# EAGLE board panel - type I - front - complete (EAGLE 6.1)
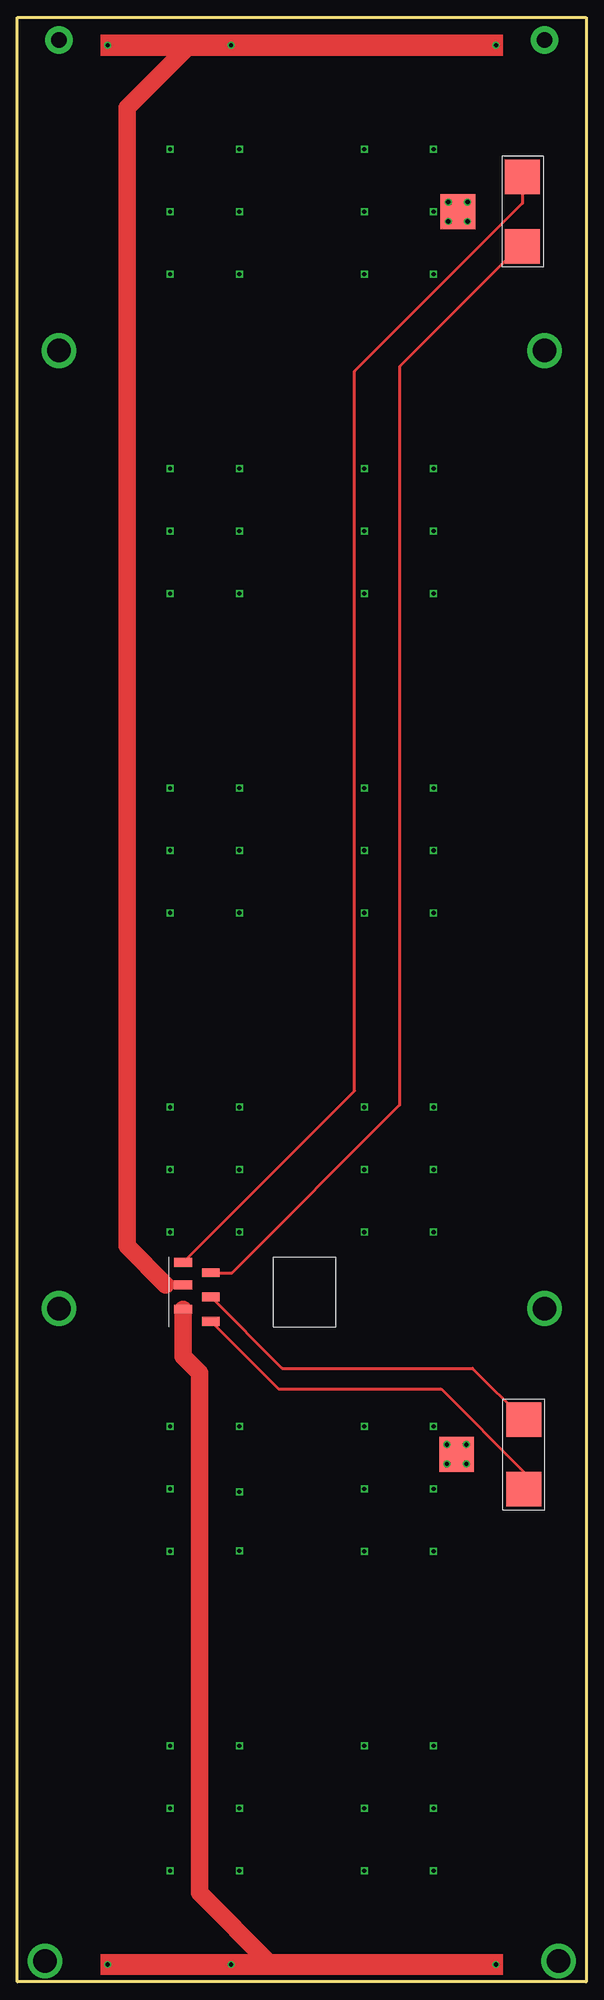
[diagram p0: board, top side]
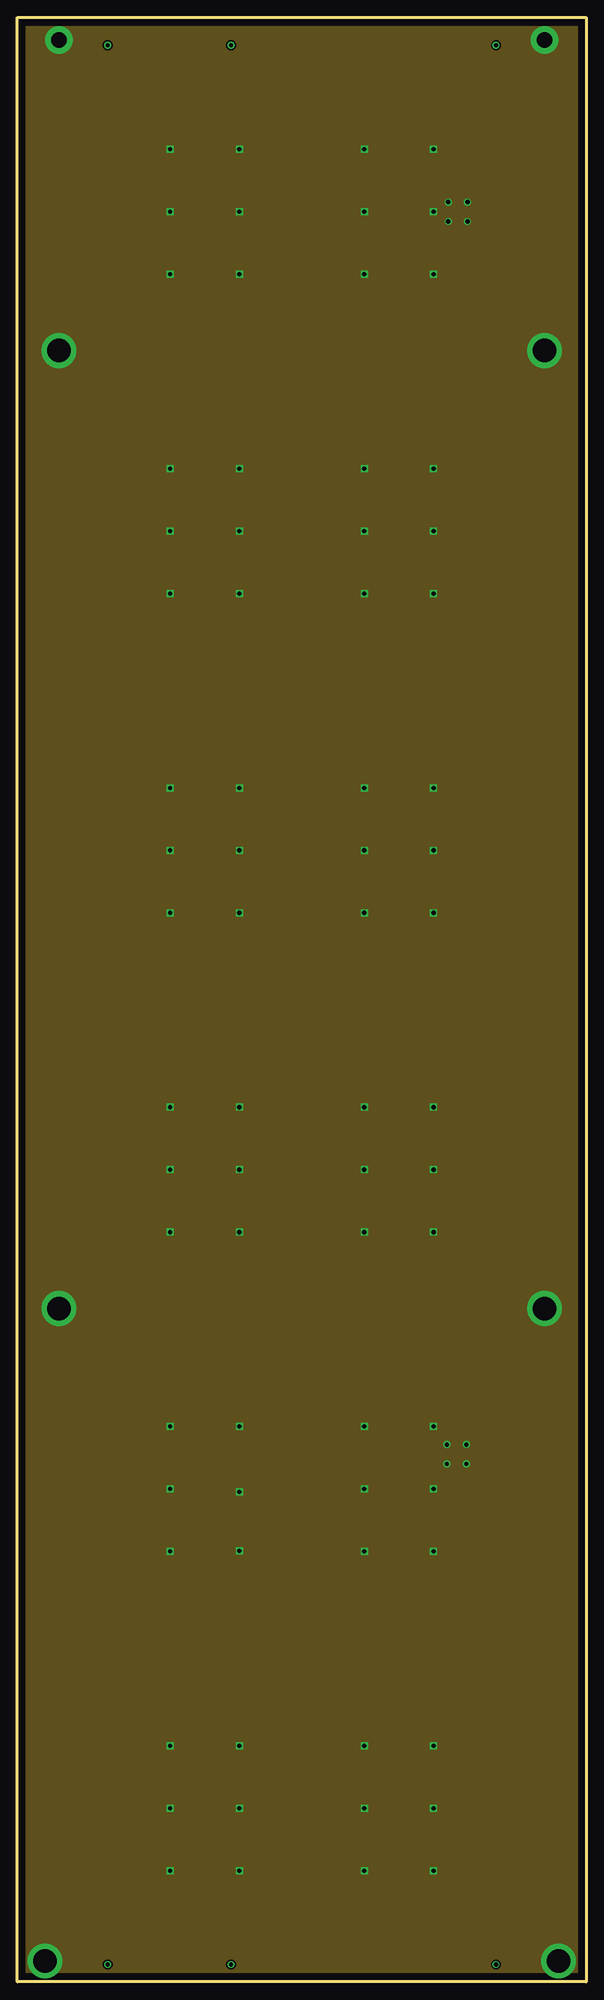
[diagram p1: board, inner layer Route2]
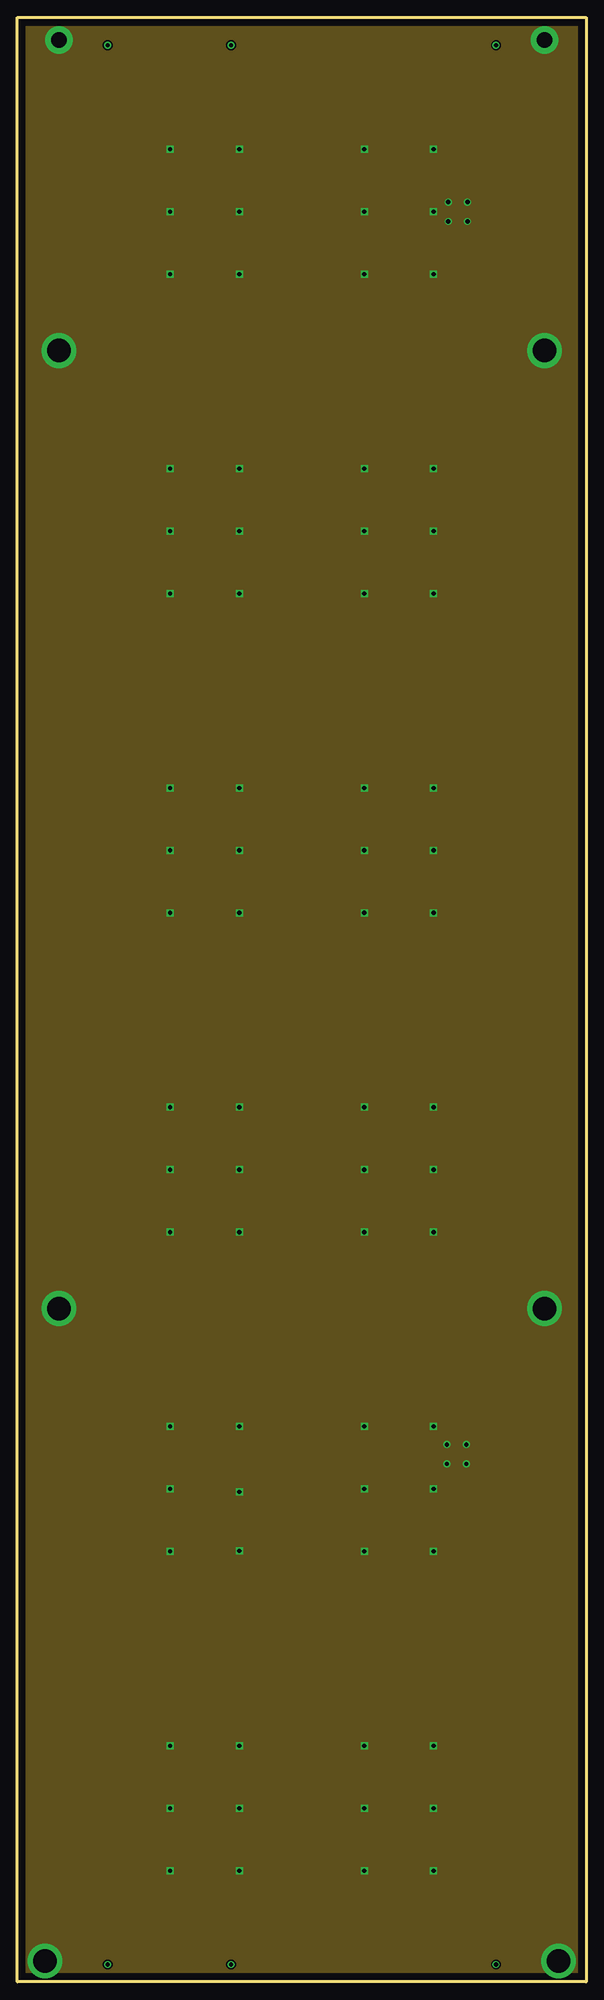
[diagram p2: board, inner layer Route15]
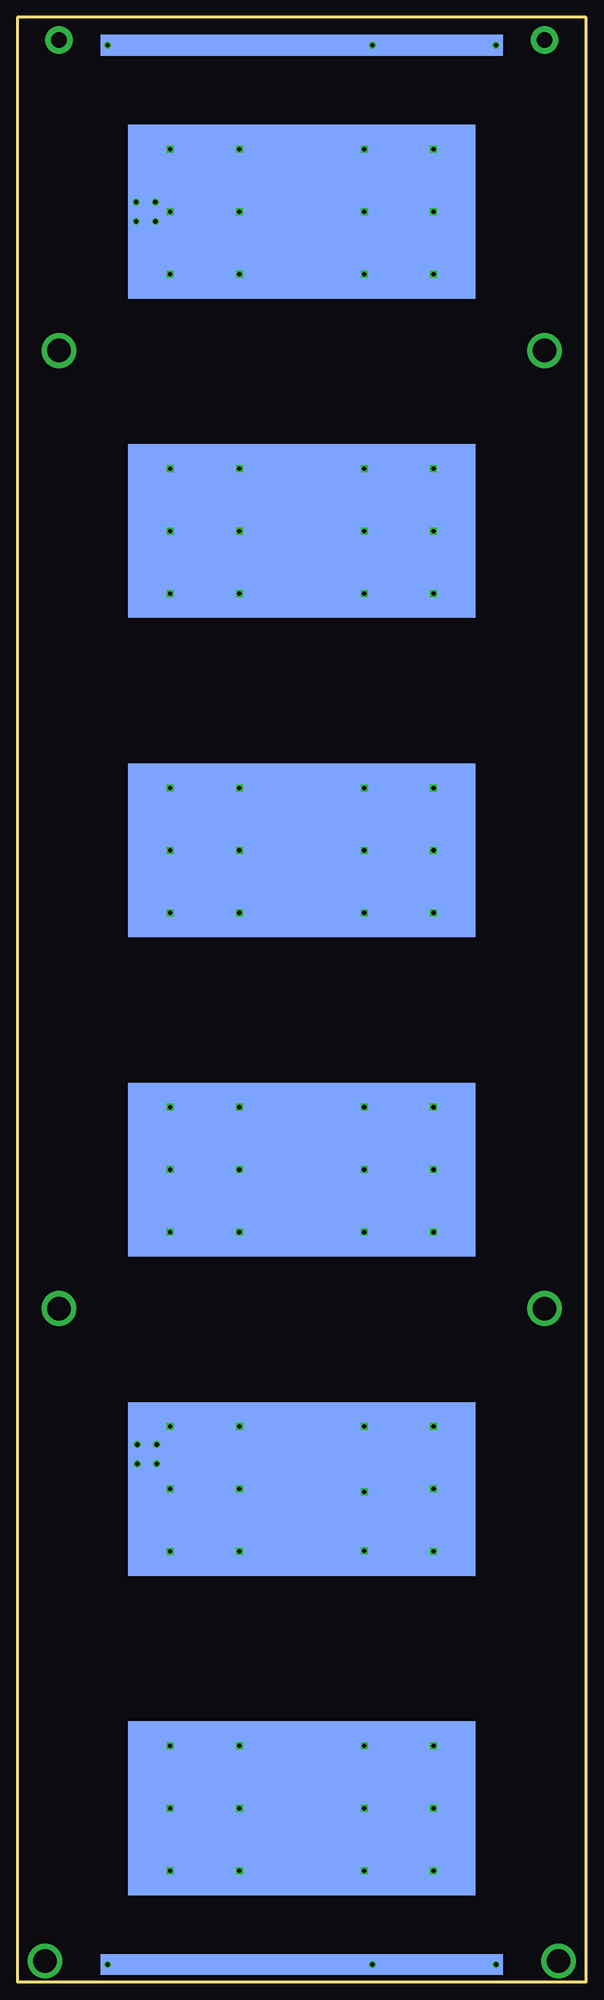
[diagram p3: board, bottom side, seen from below]

Size 82 x 283 mm. Coordinates in mm from the lower left corner, seen from the top.
Outline: 0,0 0,283 82,283 82,0 0,0
Copper layers (1*2*15*16): Top 0.035mm / dielectric 1.5mm / Route2 0.035mm / dielectric 0.15mm / Route15 0.035mm / dielectric 0.2mm / Bottom 0.035mm
Design rules: minimum track width 10mil, minimum drill 24mil, track to track 8mil, track to pad 8mil, pad to pad 8mil, via to via 8mil, smd to smd 8mil, copper to edge 40mil, drill to drill 8mil, minimum pad ring 10mil, minimum via ring 8mil, stop-mask expansion 4mil, vias tented up to drill 0mil, thermal gap 10mil

## Footprints (pad centres in the part's own frame; a part is rotated, then mirrored left to right if it is on the bottom)
GENERIC-2PORT = smd 5 x 5: P$1 5,0; P$2 -5,0
M80-8120605-SM = smd 2.54 x 1.27: P$1 17.5,2.5; P$2 13.5,0.75; P$3 17.5,-1; P$4 13.5,-2.75; P$6 13.5,4.25; P$7 17.5,-4.25
SOLARPNL_CIC_PAD = smd 58 x 3: P$3 0,0
SMD_THRM_PAD = smd 5 x 5: P$1 0,0
SOLARPNL_THRM_PAD = smd 50 x 25: P$1 0,0

## Placement (x,y rotation side)
E$1  [GENERIC-2PORT]  72.8,255 270 top
E$2  [GENERIC-2PORT]  73,76 90 top
E$3  [M80-8120605-SM]  41.4,99.4 180 top
E$5  [SOLARPNL_CIC_PAD]  41,279 0 bottom
E$6  [SMD_THRM_PAD]  63.3,76 0 top
E$7  [SMD_THRM_PAD]  63.5,255 0 top
E$8  [SOLARPNL_THRM_PAD]  41,25 180 bottom
E$9  [SOLARPNL_THRM_PAD]  41,71 180 bottom
E$10  [SOLARPNL_THRM_PAD]  41,117 180 bottom
E$11  [SOLARPNL_THRM_PAD]  41,163 180 bottom
E$12  [SOLARPNL_THRM_PAD]  41,209 180 bottom
E$13  [SOLARPNL_THRM_PAD]  41,255 180 bottom
E$14  [SOLARPNL_CIC_PAD]  41,2.5 0 bottom

## Library data of the parts
E$1-E$3 E$5-E$14 = space-concordia-power

## Nets
S$1: E$2.P$2 E$3.P$6
S$2: E$2.P$1 E$3.P$2
S$3: E$1.P$1 E$3.P$4
S$4: E$1.P$2 E$3.P$7
S$5: E$3.P$1 E$14.P$3
S$6: E$3.P$3 E$5.P$3

## Tracks (layer width: path | path; a pad name or v marks a point on that pad's centre or on a via)
S$1
  Top 0.406: E$3.P$6 37.65,85.4 61.1,85.4 73,73.5 E$2.P$2
S$2
  Top 0.406: E$3.P$2 38.15,88.4 65.6,88.4 E$2.P$1
S$3
  Top 0.406: E$3.P$4 30.95,102.15 55.1,126.3 55.1,232.7 72.4,250 E$1.P$1
S$4
  Top 0.406: E$3.P$7 48.6,128.35 48.6,232 72.8,256.2 E$1.P$2
S$5  (via drill 0.6)
  Top 0.406: v69,2.5 36.6,2.5
  Top 2.54: E$3.P$1 23.9,90.1 26.3,87.7 26.3,12.8 36.6,2.5
  Bottom 1.27: v30.8,2.5 v13,2.5 | E$14.P$3 v30.8,2.5 | v30.8,2.5 v69,2.5
S$6  (via drill 0.6)
  Top 0.406: 24.8,279 v69,279
  Top 1.27: E$3.P$3 21.4,100.4
  Top 2.54: 21.4,100.4 15.8,106 15.8,270 24.8,279
  Bottom 1.27: E$5.P$3 v30.8,279 | v13,279 v30.8,279 | v30.8,279 v69,279
THERMAL1  (via drill 0.6, 2.2 pad 4, 3.4 pad 5)
  other vias: 4,3 78,3 76,97 76,235 6,97 6,235 6,279.75 76,279.75 62.1,256.4 64.9,256.4 64.9,253.6 62.1,253.6 64.7,77.4 64.7,74.6 61.9,74.6 61.9,77.4 22,16 32,16 32,25 22,25 22,34 32,34 50,16 60,16 60,25 50,25 50,34 60,34 22,62 22,71 22,80 32,80 32,70.6 32,62.1 50,62 60,62 60,71 50,71 50,80 60,80 22,108 32,108 32,117 22,117 22,126 32,126 50,126 60,126 60,117 60,108 50,108 50,117 22,154 32,154 32,163 22,163 22,172 32,172 50,172 50,163 50,154 60,154 60,163 60,172 60,200 60,209 60,218 50,218 50,209 50,200 32,200 32,209 32,218 22,218 22,209 22,200 22,246 22,255 22,264 32,264 32,255 32,246 50,246 60,246 60,255 60,264 50,264 50,255
  pour Route2: 0,283.2 82.6,283.2 82.6,-0.6 0,-0.6
  pour Route15: -0.3,-0.3 82.4,-0.3 82.4,283.7 -0.3,283.7
(copper drawn outside any net)
  shapes: Top area x2